# Altium PCB MainBoard.PcbDoc
Units mm, origin at the board's own origin, x right, y up, seen from the top; angles counter-clockwise.
Board outline 150 x 100 mm, 2 copper layers (Top Layer, Bottom Layer); 22 components, 85 nets, 189 pads, 0 vias.
Unrouted connection lines stored in the file: 5.
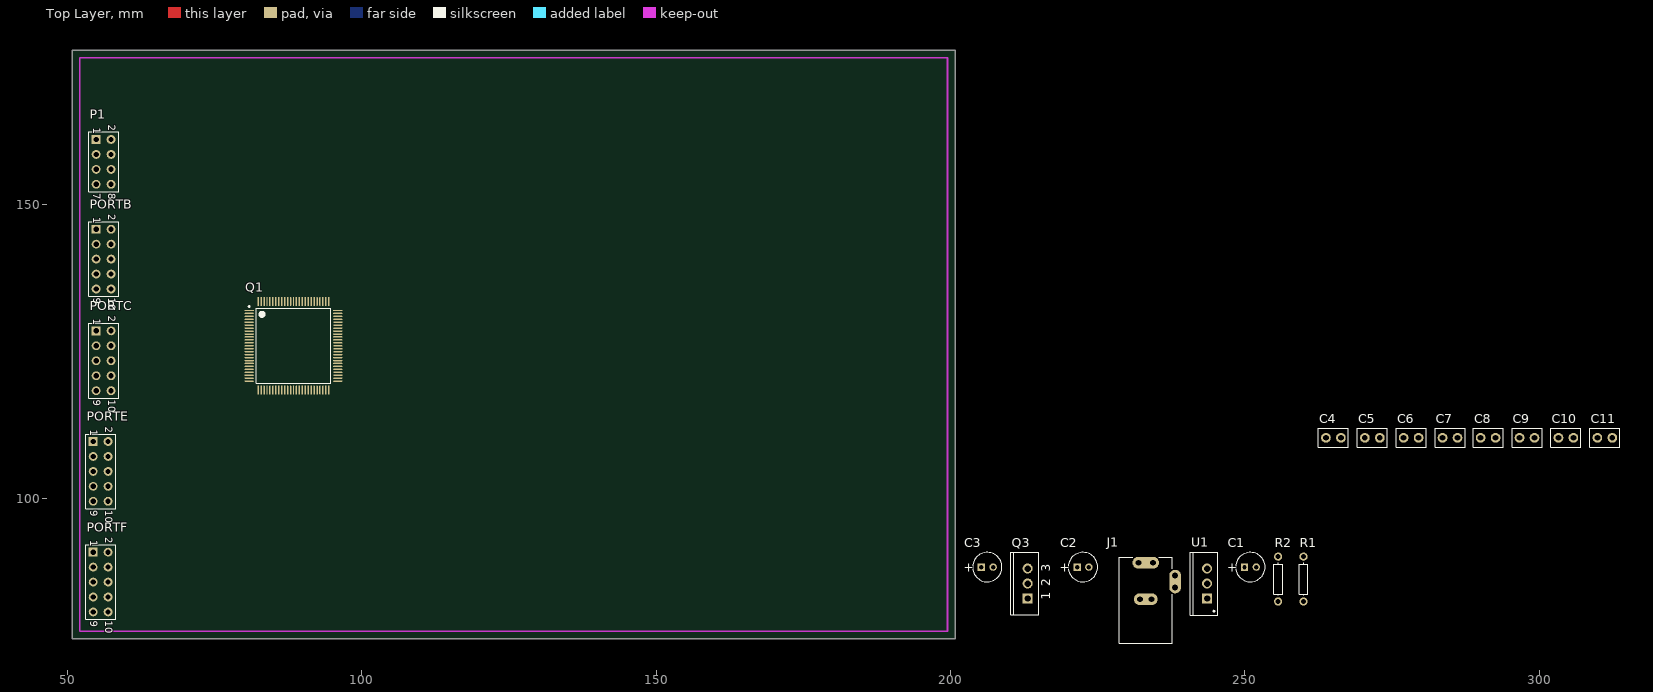
[diagram p0: Top Layer view]
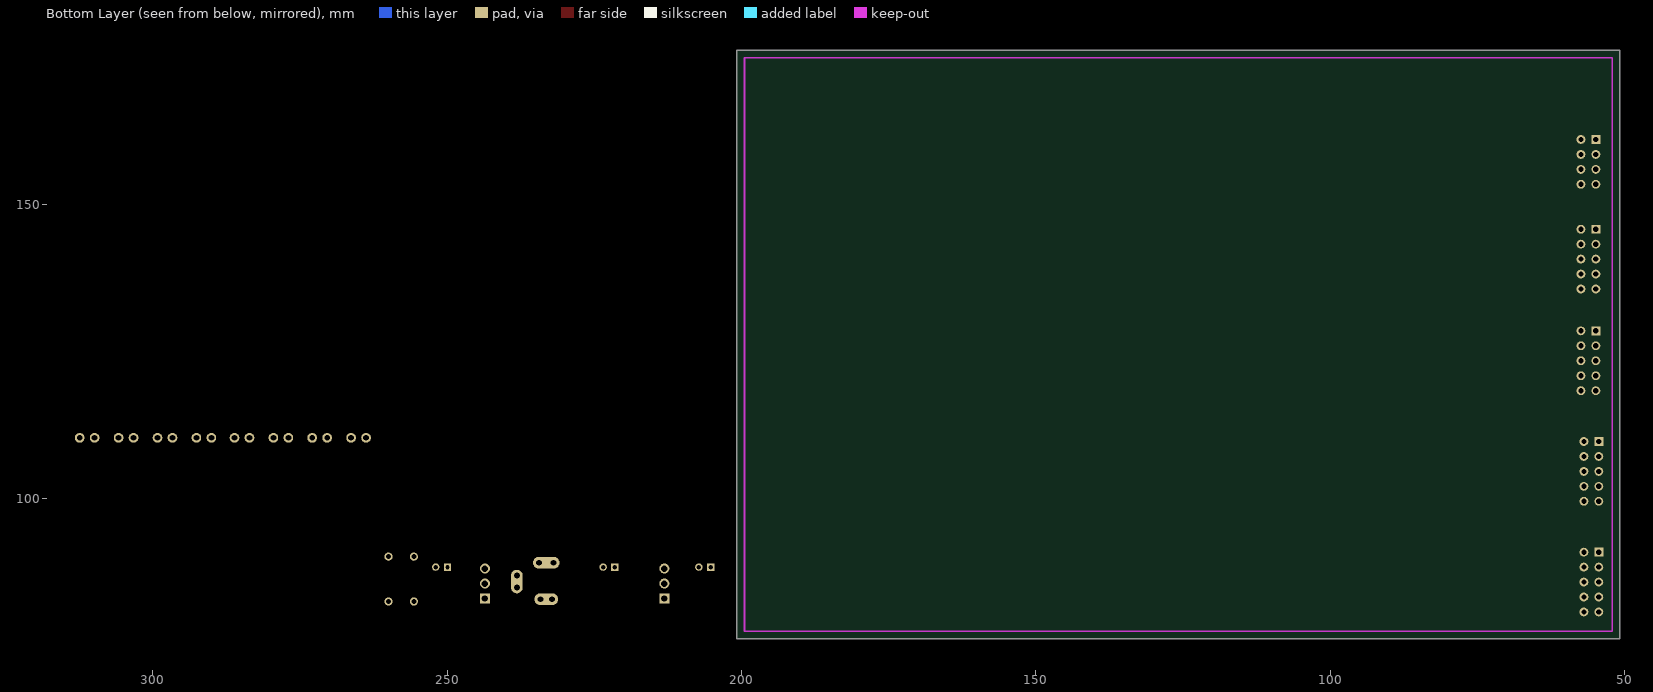
[diagram p1: Bottom Layer view, seen from below]

## Layer stack, top to bottom
Top Layer: signal copper 0.0356
Dielectric: dielectric 0.32, FR-4, Dk 4.8
Bottom Layer: signal copper 0.0356

## Board outline
50.8,76.2 200.8,76.2 200.8,176.2 50.8,176.2

## Design rules (kind name [scope] priority, off if disabled: settings)
Clearance [All] p1: gap=0.3
PolygonConnect [All] p1: connectstyle=Relief reliefconductorwidth=0.254 reliefentries=4 polygonreliefangle="90 Angle"
RoomDefinition MainBoard_XMega [InComponentClass('MainBoard_XMega')] p1: confinementstyle=ConfineIn formatcopy=TRUE lockcomponents=FALSE outline 201.93,94.996 313.944,94.996 313.944,114.808 201.93,114.808
RoomDefinition MainBoard_PSU [InComponentClass('MainBoard_PSU')] p2: confinementstyle=ConfineIn formatcopy=TRUE lockcomponents=FALSE outline 201.93,75.184 261.874,75.184 261.874,93.726 201.93,93.726
RoutingVias [All] p1: holewidth=0.8 width=1.6 viastyle="Through Hole" minholewidth=0.711 minwidth=1.27 maxholewidth=0.711 maxwidth=1.27
SilkscreenOverComponentPads [All] p1: minsilkscreentomaskgap=0.254
SolderMaskExpansion [All] p1: expansion=0.102
Width [All] p1: maxlimit=0.3 minlimit=0.3 preferedwidth=0.3
27 further rules are at their usual default settings.

## Classes and differential pairs
component class MainBoard_XMega: C4 C5 C6 C7 C8 C9 C10 C11 P1 PORTB PORTC PORTE PORTF Q1
component class MainBoard_PSU: C1 C2 C3 J1 Q2 Q3 R1 R2 U1

## Components (designator, comment, footprint, x,y, rotation, side; value= is the part's Value field where it differs from the comment)
C1 "Cap Pol1" CAPPR2-5x6.8 250.952,88.392 r0 top
C2 "Cap Pol1" CAPPR2-5x6.8 222.504,88.392 r0 top
C3 "Cap Pol1" CAPPR2-5x6.8 206.248,88.392 r0 top
C4 "Cap" CAPR2.54-5.1x3.2 265.049,110.363 r0 top
C5 "Cap" CAPR2.54-5.1x3.2 271.653,110.363 r0 top
C6 "Cap" CAPR2.54-5.1x3.2 278.257,110.363 r0 top
C7 "Cap" CAPR2.54-5.1x3.2 284.861,110.363 r0 top
C8 "Cap" CAPR2.54-5.1x3.2 291.338,110.363 r0 top
C9 "Cap" CAPR2.54-5.1x3.2 297.942,110.363 r0 top
C10 "Cap" CAPR2.54-5.1x3.2 304.546,110.363 r0 top
C11 "Cap" CAPR2.54-5.1x3.2 311.15,110.363 r0 top
J1 "PWR2.5" KLD-0202 233.172,75.438 r90 top
P1 "Header 4X2" HDR2X4 54.864,161.036 r270 top
PORTB "Header 5X2" HDR2X5 54.864,145.796 r270 top
PORTC "Header 5X2" HDR2X5 54.864,128.524 r270 top
PORTE "Header 5X2" HDR2X5 54.356,109.728 r270 top
PORTF "Header 5X2" HDR2X5 54.356,90.932 r270 top
Q1 "AT-XMega128A1_TQFP100" TQFP100_L 88.392,125.984 r0 top
Q3 "AnyVolt-Micro" TO-220 213.106,85.598 r90 top
R1 "Res1" AXIAL-0.3 259.969,86.36 r90 top
R2 "Res1" AXIAL-0.3 255.651,86.36 r90 top
U1 "MCP1825S-3302E/AB" TO-220-AB3 243.586,85.598 r90 top

## Footprints (in the part's own frame and the unit in brackets; to place one, negate y for a bottom-side part, rotate by r counter-clockwise, add the part's x,y. Pads: shape width x height; smd on the part's side, far side on the other; paste and mask are expansions set on the pad)
AXIAL-0.3 [mm] "Axial Device, Thru-Hole; 2 Leads; 0.3 in Pin Spacing"
  round 1.4 hole 0.85: 1(-3.81,0) 2(3.81,0)
  silkscreen extent -2.77,-0.76 2.77,0.76
CAPPR2-5x6.8 [mm] "Capacitor, Electrolytic, Radial; Body 5 x 6.8 mm (Dia.xH typ); Pin Spacing 2 mm (typ)"
  rect 1.25x1.25 hole 0.75: 1(-1,0)
  round 1.25 hole 0.75: 2(1,0)
  silkscreen extent -2.5,-2.5 2.5,2.5
CAPR2.54-5.1x3.2 [mm] "Capacitor, Ceramic, Thru-Hole, Dipped Radial; Body 5.1 x 3.2 mm (WxT) Pin Spacing 2.54 mm (typ)"
  round 1.65 hole 1: 1(-1.27,0) 2(1.27,0)
  silkscreen extent -2.55,-1.6 2.55,1.6
HDR2X4 [mm] "Connector; Header; 4x2 Position"
  rect 1.5x1.5 hole 0.9: 1(0,0)
  round 1.5 hole 0.9: 2(0,2.54) 3(2.54,0) 4(2.54,2.54) 5(5.08,0) 6(5.08,2.54) 7(7.62,0) 8(7.62,2.54)
  silkscreen extent -1.27,-1.27 8.89,3.81
HDR2X5 [mm] "Connector; Header; 5x2 Position"
  rect 1.5x1.5 hole 0.9: 1(0,0)
  round 1.5 hole 0.9: 2(0,2.54) 3(2.54,0) 4(2.54,2.54) 5(5.08,0) 6(5.08,2.54) 7(7.62,0) 8(7.62,2.54) 9(10.16,0) 10(10.16,2.54)
  silkscreen extent -1.27,-1.27 11.43,3.81
KLD-0202 [mm] "DC Power Jack, 2.5mm, KLD Series, PCB Mount"
  oval 2x4.5 all layers, no hole: 1(13.7,0)
  round 1.5 hole 1: 1A(13.7,-1.25) 1B(13.7,1.25) 2A(7.5,-1) 2B(7.5,1) 3A(9.5,-5) 3B(11.5,-5)
  oval 2x4 all layers, no hole: 2(7.5,0)
  oval 4x2 all layers, no hole: 3(10.5,-5)
  silkscreen extent 0,-4.5 14.6,4.5
TO-220 [mm] "TO, Thru-Hole, Vertical, Heatsink Mounted; 3 In-Line Leads; Pitch 2.54 mm"
  rect 1.7x1.7 hole 1.1: 1(-2.54,0)
  round 1.7 hole 1.1: 2(0,0) 3(2.54,0)
  silkscreen extent -5.3,-1.85 5.3,2.85
TO-220-AB3 [mm] "TO, Thru-Hole, Vertical, Heatsink Mounted; 3 In-Line Leads; Pitch 2.54 mm"
  rect 1.7x1.7 hole 1.1: 1(-2.54,0)
  round 1.7 hole 1.1: 2(0,0) 3(2.54,0)
  silkscreen extent -5.35,-1.85 5.35,2.85, body extent -5.4,-1.9 5.4,2.9, height 22.9
TQFP100_L [mm] "100-Pin Plastic Thin Quad Flat Pack (TQFP100), IPC High Density"
  oval 1.55x0.25 smd: 1(-7.525,6) 2(-7.525,5.5) 3(-7.525,5) 4(-7.525,4.5) 5(-7.525,4) 6(-7.525,3.5) 7(-7.525,3) 8(-7.525,2.5) 9(-7.525,2) 10(-7.525,1.5) 11(-7.525,1) 12(-7.525,0.5) 13(-7.525,0) 14(-7.525,-0.5) 15(-7.525,-1) 16(-7.525,-1.5) 17(-7.525,-2) 18(-7.525,-2.5) 19(-7.525,-3) 20(-7.525,-3.5) 21(-7.525,-4) 22(-7.525,-4.5) 23(-7.525,-5) 24(-7.525,-5.5) 25(-7.525,-6) 51(7.525,-6) 52(7.525,-5.5) 53(7.525,-5) 54(7.525,-4.5) 55(7.525,-4) 56(7.525,-3.5) 57(7.525,-3) 58(7.525,-2.5) 59(7.525,-2) 60(7.525,-1.5) 61(7.525,-1) 62(7.525,-0.5) 63(7.525,0) 64(7.525,0.5) 65(7.525,1) 66(7.525,1.5) 67(7.525,2) 68(7.525,2.5) 69(7.525,3) 70(7.525,3.5) 71(7.525,4) 72(7.525,4.5) 73(7.525,5) 74(7.525,5.5) 75(7.525,6)
  oval 0.25x1.55 smd: 26(-6,-7.525) 27(-5.5,-7.525) 28(-5,-7.525) 29(-4.5,-7.525) 30(-4,-7.525) 31(-3.5,-7.525) 32(-3,-7.525) 33(-2.5,-7.525) 34(-2,-7.525) 35(-1.5,-7.525) 36(-1,-7.525) 37(-0.5,-7.525) 38(0,-7.525) 39(0.5,-7.525) 40(1,-7.525) 41(1.5,-7.525) 42(2,-7.525) 43(2.5,-7.525) 44(3,-7.525) 45(3.5,-7.525) 46(4,-7.525) 47(4.5,-7.525) 48(5,-7.525) 49(5.5,-7.525) 50(6,-7.525) 76(6,7.525) 77(5.5,7.525) 78(5,7.525) 79(4.5,7.525) 80(4,7.525) 81(3.5,7.525) 82(3,7.525) 83(2.5,7.525) 84(2,7.525) 85(1.5,7.525) 86(1,7.525) 87(0.5,7.525) 88(0,7.525) 89(-0.5,7.525) 90(-1,7.525) 91(-1.5,7.525) 92(-2,7.525) 93(-2.5,7.525) 94(-3,7.525) 95(-3.5,7.525) 96(-4,7.525) 97(-4.5,7.525) 98(-5,7.525) 99(-5.5,7.525) 100(-6,7.525)
  silkscreen extent -7.65,-6.35 6.35,6.8, body extent -7,-7 7,7, height 1.2

## Part data
C1 C2 C3: "Polarized Capacitor (Radial)"
C4 C5 C6 C7 C8 C9 C10 C11: "Capacitor"
J1: "Low Voltage Power Supply Connector"
P1: "Header, 4-Pin, Dual row"
PORTB PORTC PORTE PORTF: "Header, 5-Pin, Dual row"
R1 R2: "Resistor"
U1: "500 mA, Low Voltage, Low Quiescent Current LDO Regulator, 3-Pin TO-220, Extended Temperature"

## Nets (pads, with @x,y where several pads share a name; then routed paths per layer and width w, separated by ;. In a path a pad name is that pad's centre, name@x,y a point inside that pad or via, vN(x,y) a via of type N, cw(c..) or ccw(c..) an arc to the next point about the centre after c; other vN are vias at no path point)
AVCC: Q1.4 Q1.94
GND: C1.2 C2.2 C3.2 C4.1 C5.1 C6.1 C7.1 C8.1 C9.1 C10.1 C11.1 J1.2 J1.2A J1.2B J1.3 J1.3A J1.3B P1.1 PORTB.1 PORTC.1 PORTE.1 PORTF.1 Q1.3 Q1.13 Q1.23 Q1.33 Q1.43 Q1.53 Q1.63 Q1.73 Q1.84 Q1.93 Q1.95 Q3.2 R2.1 U1.2
NetC1_1: C1.1 J1.1 J1.1A J1.1B Q3.1 R1.1
PDI: Q1.89
PDI_RESET: Q1.90
PORTA1: P1.3 Q1.96
PORTA2: P1.4 Q1.97
PORTA3: P1.5 Q1.98
PORTA5: P1.6 Q1.100
PORTA6: P1.7 Q1.1
PORTA7: P1.8 Q1.2
PORTB0: PORTB.3 Q1.5
PORTB1: PORTB.4 Q1.6
PORTB2: PORTB.5 Q1.7
PORTB3: PORTB.6 Q1.8
PORTB4: PORTB.7 Q1.9
PORTB5: PORTB.8 Q1.10
PORTB6: PORTB.9 Q1.11
PORTB7: PORTB.10 Q1.12
PORTC0: PORTC.3 Q1.15
PORTC1: PORTC.4 Q1.16
PORTC2: PORTC.5 Q1.17
PORTC3: PORTC.6 Q1.18
PORTC4: PORTC.7 Q1.19
PORTC5: PORTC.8 Q1.20
PORTC6: PORTC.9 Q1.21
PORTC7: PORTC.10 Q1.22
PORTD0: Q1.25
PORTD1: Q1.26
PORTD2: Q1.27
PORTD3: Q1.28
PORTD4: Q1.29
PORTD5: Q1.30
PORTD6: Q1.31
PORTD7: Q1.32
PORTE0: PORTE.3 Q1.35
PORTE1: PORTE.4 Q1.36
PORTE2: PORTE.5 Q1.37
PORTE3: PORTE.6 Q1.38
PORTE4: PORTE.7 Q1.39
PORTE5: PORTE.8 Q1.40
PORTE6: PORTE.9 Q1.41
PORTE7: PORTE.10 Q1.42
PORTF0: PORTF.3 Q1.45
PORTF1: PORTF.4 Q1.46
PORTF2: PORTF.5 Q1.47
PORTF3: PORTF.6 Q1.48
PORTF4: PORTF.7 Q1.49
PORTF5: PORTF.8 Q1.50
PORTF6: PORTF.9 Q1.51
PORTF7: PORTF.10 Q1.52
PORTH0: Q1.55
PORTH1: Q1.56
PORTH2: Q1.57
PORTH3: Q1.58
PORTH4: Q1.59
PORTH5: Q1.60
PORTH6: Q1.61
PORTH7: Q1.62
PORTJ0: Q1.65
PORTJ1: Q1.66
PORTJ2: Q1.67
PORTJ3: Q1.68
PORTJ4: Q1.69
PORTJ5: Q1.70
PORTJ6: Q1.71
PORTJ7: Q1.72
PORTK0: Q1.75
PORTK1: Q1.76
PORTK2: Q1.77
PORTK3: Q1.78
PORTK4: Q1.79
PORTK5: Q1.80
PORTK6: Q1.81
PORTK7: Q1.82
PORTQ0: Q1.85
PORTQ1: Q1.86
PORTQ2: Q1.87
PORTQ3: Q1.88
PORTR0: Q1.91
PORTR1: Q1.92
V_3P3: C4.2 C5.2 C6.2 C7.2 C8.2 C9.2 C10.2 C11.2 P1.2 PORTB.2 PORTC.2 PORTE.2 PORTF.2 Q1.14 Q1.24 Q1.34 Q1.44 Q1.54 Q1.64 Q1.74 Q1.83 U1.3
V_5V: C2.1 U1.1
V_12V: C3.1 Q3.3
V_DIV: Q1.99 R1.2 R2.2

## Keep-outs
Keep-Out Layer:
  lines w0.3: 52.1,77.5 52.1,174.9 199.5,174.9 199.5,77.5 52.1,77.5

## Silkscreen, mask and mechanical layers (free items; w line width, h text height)
Drill Drawing:
  text ".LEGEND" at 205.88,81.28 h1.52
  text "Drill Drawing." at 205.88,78.74 h1.52

## Dimensions
52.1,77.5 to 52.1,174.9 on Mechanical 1
52.1,77.5 to 199.5,77.5 on Mechanical 1

## Text inside footprints (layer, text, board x,y; h text height)
C1: Top Overlay "+" at 246.977,87.642 h1.5
C2: Top Overlay "+" at 218.529,87.642 h1.5
C3: Top Overlay "+" at 202.273,87.642 h1.5
J1: Mechanical 1 "Mech 2 - Clearance, move to internal plane if present" at 228.106,75.724 h0.3 r90; Mechanical 1 "Mech 1 - Slot cut-out" at 227.606,75.724 h0.3 r90; Mechanical 1 "Assign keep-out area to slot" at 226.606,75.724 h0.3 r90; Mechanical 1 "Alert PCB fab to slot details" at 227.106,75.724 h0.3 r90
P1: Top Overlay "2" at 56.896,163.576 h1.27 r270; Top Overlay "1" at 54.356,163.068 h1.27 r270; Top Overlay "7" at 54.356,151.892 h1.27 r270; Top Overlay "8" at 56.896,151.892 h1.27 r270
PORTB: Top Overlay "10" at 56.896,134.112 h1.27 r270; Top Overlay "9" at 54.356,134.112 h1.27 r270; Top Overlay "1" at 54.356,147.828 h1.27 r270; Top Overlay "2" at 56.896,148.336 h1.27 r270
PORTC: Top Overlay "10" at 56.896,116.84 h1.27 r270; Top Overlay "9" at 54.356,116.84 h1.27 r270; Top Overlay "1" at 54.356,130.556 h1.27 r270; Top Overlay "2" at 56.896,131.064 h1.27 r270
PORTE: Top Overlay "10" at 56.388,98.044 h1.27 r270; Top Overlay "9" at 53.848,98.044 h1.27 r270; Top Overlay "1" at 53.848,111.76 h1.27 r270; Top Overlay "2" at 56.388,112.268 h1.27 r270
PORTF: Top Overlay "10" at 56.388,79.248 h1.27 r270; Top Overlay "9" at 53.848,79.248 h1.27 r270; Top Overlay "1" at 53.848,92.964 h1.27 r270; Top Overlay "2" at 56.388,93.472 h1.27 r270
Q3: Top Overlay "3" at 216.931,87.638 h1.5 r90; Top Overlay "2" at 216.931,85.098 h1.5 r90; Top Overlay "1" at 216.931,82.808 h1.5 r90